# EAGLE board cog-1602-v0 (EAGLE 5.07)
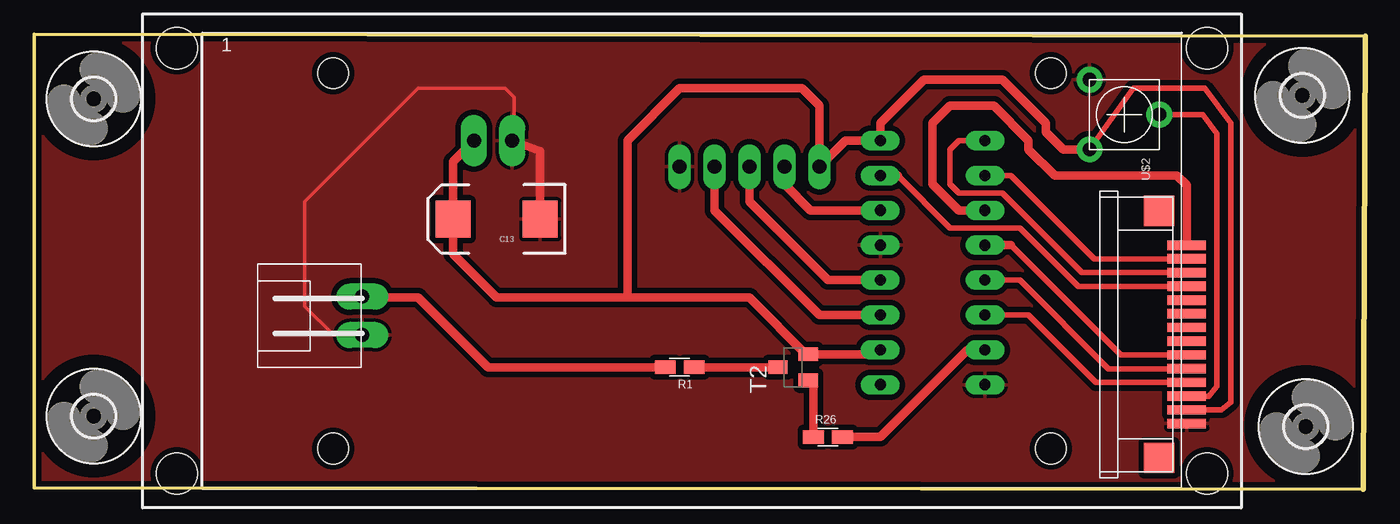
[diagram p0: board, top side]
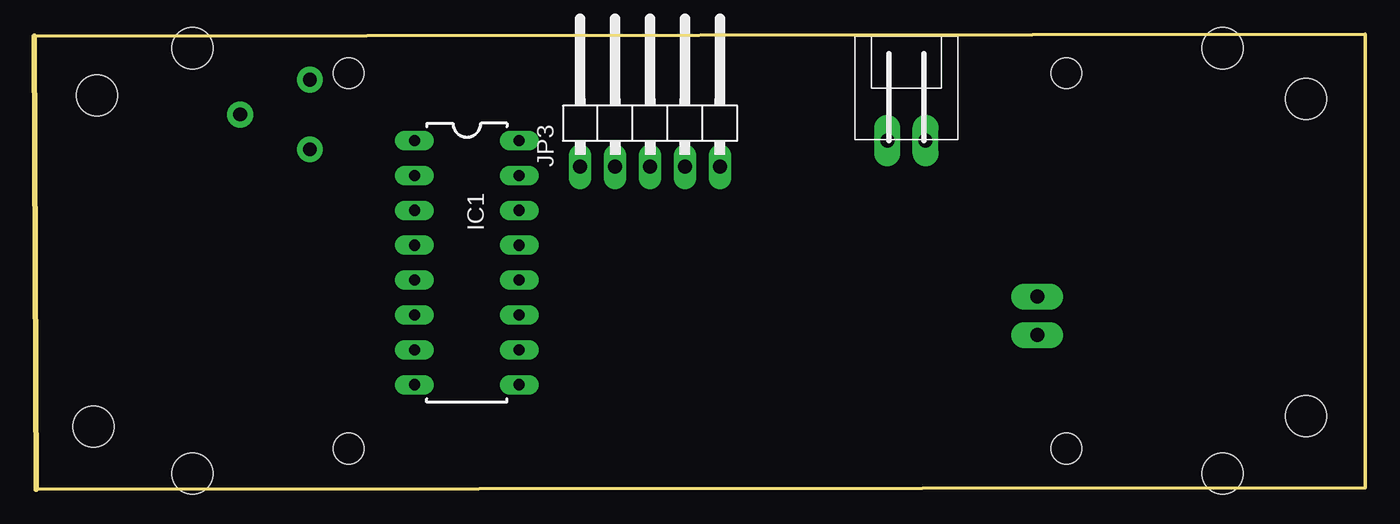
[diagram p1: board, bottom side, seen from below]

Size 96.9 x 33.15 mm. Coordinates in mm from the lower left corner, seen from the top.
Outline: 0,0.13 0,33.15 96.9,33.02 96.77,0 0,0.13
Copper layers (1*16): Top 0.035mm / dielectric 1.5mm / Bottom 0.035mm
Design rules "SparkFun": minimum track width 8mil, minimum drill 20mil, track to track 8mil, track to pad 8mil, pad to pad 8mil, via to via 8mil, smd to smd 8mil, copper to edge 10mil, drill to drill 8mil, minimum pad ring 12mil, minimum via ring 10mil, stop-mask expansion 4mil, vias tented up to drill 25mil, thermal gap 10mil

## Footprints (pad centres in the part's own frame; a part is rotated, then mirrored left to right if it is on the bottom)
EIA7343 = smd 2.55 x 2.7: A 3.17,0; C -3.17,0
3,0 = hole 3: 0,0
DIL16 = drill 0.813 long: 1 -8.89,-3.81; 2 -6.35,-3.81; 3 -3.81,-3.81; 4 -1.27,-3.81; 5 1.27,-3.81; 6 3.81,-3.81; 7 6.35,-3.81; 8 8.89,-3.81; 9 8.89,3.81; 10 6.35,3.81; 11 3.81,3.81; 12 1.27,3.81; 13 -1.27,3.81; 14 -3.81,3.81; 15 -6.35,3.81; 16 -8.89,3.81
XH-1X2-LONG-LOCK = drill 1.016 pad 1.88 long: 1 1.397,0; 2 -1.397,0
1X05/90 = drill 1.016 long: 1 -5.08,-3.81; 2 -2.54,-3.81; 3 0,-3.81; 4 2.54,-3.81; 5 5.08,-3.81
R0805W = smd 1.5 x 1: 1 -1.052,0; 2 1.052,0
SOT23-BEC = smd 1 x 1.4: B -0.95,-1.1; C 0,1.1; E 0.95,-1.1
LCD-1602-YHDS = drill 1.016 pad 1.88 long: A -24,-2.603; K -24,-5.397 | smd 2.8 x 0.68: P$1 36.02,-11.85; P$2 36.02,-10.85; P$3 36.02,-9.85; P$4 36.02,-8.85; P$5 36.02,-7.85; P$6 36.02,-6.85; P$7 36.02,-5.85; P$8 36.02,-4.85; P$9 36.02,-3.85; P$10 36.02,-2.85; P$11 36.02,-1.85; P$12 36.02,-0.85; P$13 36.02,0.15; P$14 36.02,1.15 | smd 2.2 x 2.2: PAD1 34.02,3.65; PAD2 34.02,-14.35 | hole 3: -37.5,15.5; -37.5,-15.5; 37.5,15.5; 37.5,-15.5 | hole 2.24: -26.13,13.67; -26.13,-13.67; 26.13,-13.67; 26.13,13.67
TRIM_POT_PTH = drill 1 pad 1.88 round: 1 -2.54,-2.54; 2 0,2.54; 3 2.54,-2.54

## Placement (x,y rotation side)
C13  10u  [EIA7343]  33.66,19.68 180 top
H1  MOUNT-HOLE3.0  [3,0]  4.32,28.45 0 top
H2  MOUNT-HOLE3.0  [3,0]  4.32,5.33 0 top
H3  MOUNT-HOLE3.0  [3,0]  92.58,4.57 0 top
H4  MOUNT-HOLE3.0  [3,0]  92.33,28.7 0 top
IC1  74LS595N  [DIL16]  65.41,16.51 270 bottom
JP1  [XH-1X2-LONG-LOCK]  33.4,25.4 0 bottom
JP3  [1X05/90]  52.07,27.3 0 bottom
R1  20R  [R0805W]  46.99,8.89 180 top
R26  1k  [R0805W]  57.78,3.81 0 top
T2  8550  [SOT23-BEC]  55.24,8.89 90 top
U$1  LCD-16X2  [LCD-1602-YHDS]  47.88,16.64 0 top
U$2  10k  [TRIM_POT_PTH]  79.38,27.3 270 top

## Library data of the parts
C13 IC1 U$2 = SparkFun
H1-H4 = holes
JP1 R1 R26 T2 U$1 = digital-toy
JP3 = pinhead

## Nets
GND: C13.C IC1.8 IC1.13 JP1.2 JP3.5 U$1.K U$1.P$1 U$2.1
N$1: IC1.15 U$1.P$11
N$2: IC1.1 U$1.P$12
N$3: IC1.2 U$1.P$13
N$4: IC1.3 U$1.P$14
N$5: IC1.4 U$1.P$6
N$6: IC1.5 U$1.P$5
N$7: IC1.6 U$1.P$4
N$8: IC1.7 R26.2
N$10: IC1.14 JP3.2
N$11: IC1.11 JP3.4
N$13: IC1.12 JP3.3
N$15: U$1.P$3 U$2.2
N$16: R1.2 U$1.A
N$19: R1.1 T2.C
N$55: R26.1 T2.B
VCC: C13.A IC1.10 IC1.16 JP1.1 JP3.1 T2.E U$1.P$2 U$2.3

## Tracks (layer width: path | path; a pad name or v marks a point on that pad's centre or on a via)
GND
  Top 0.254: U$1.K 21.78,11.24 19.68,13.34 19.68,20.96 27.94,29.21 34.29,29.21 34.92,28.57 34.92,26.54 | 34.92,26.54 34.92,26.04 | 34.92,26.54 JP1.2
  Top 0.61: C13.C 36.82,24.64 JP1.2
  pour Top (isolate 0.406): 0,44.45 0,45.72 97.79,45.72 97.79,-11.43 0.63,-11.43 0.63,44.45
N$1
  Top 0.406: U$1.P$11 76.02,14.79 71.76,19.05 66.67,19.05 62.86,22.86
  Top 0.61: IC1.15 62.86,22.86
N$2
  Top 0.406: U$1.P$12 76.29,15.79 70.48,21.59 67.31,21.59 66.67,22.23 66.67,24.77 67.31,25.4 IC1.1
N$3
  Top 0.406: U$1.P$13 77.19,16.79 71.12,22.86 IC1.2
N$4
  Top 0.61: U$1.P$14 83.9,22.15 83.19,22.86 74.3,22.86 72.39,24.77 72.39,25.4 69.85,27.94 66.67,27.94 65.41,26.67 65.41,22.23 67.31,20.32 IC1.3
N$5
  Top 0.406: U$1.P$6 79.11,9.79 71.12,17.78
  Top 0.61: IC1.4 71.12,17.78
N$6
  Top 0.254: IC1.5 68.58,15.24
  Top 0.406: U$1.P$5 78.21,8.79 71.76,15.24 IC1.5
N$7
  Top 0.406: U$1.P$4 77.3,7.79 72.39,12.7 IC1.6
N$8
  Top 0.61: R26.2 61.59,3.81 67.95,10.16 IC1.7
N$10
  Top 0.406: JP3.2 54.61,22.23
  Top 0.61: IC1.14 56.52,20.32 54.61,22.23
N$11
  Top 0.61: IC1.11 57.15,12.7 49.53,20.32 JP3.4
N$13
  Top 0.61: IC1.12 57.78,15.24 52.07,20.96 JP3.3
N$15
  Top 0.406: U$1.P$3 85.53,6.79 86.11,7.49 86.11,25.91 85.09,27.3 U$2.2
N$16
  Top 0.254: U$1.A 23.94,13.97
  Top 0.61: R1.2 33.02,8.89 27.94,13.97 23.94,13.97
N$19
  Top 0.61: R1.1 T2.C
N$55
  Top 0.61: R26.1 56.73,7.55 T2.B
VCC
  Top 0.254: 61.27,9.84 IC1.10 | C13.A
  Top 0.406: U$1.P$2 86.43,5.79 87.12,6.35 87.12,26.67 85.22,29.21 80.01,29.21 U$2.3
  Top 0.61: 61.27,9.84 T2.E 56.34,9.7 52.07,13.97 43.18,13.97 | C13.A 30.48,23.88 JP1.1 | U$2.3 74.93,24.77 73.66,26.04 73.66,26.67 70.48,29.84 64.77,29.84 61.59,26.67 IC1.16 59.05,25.4 JP3.1 57.15,27.94 55.88,29.21 46.99,29.21 43.18,25.4 43.18,13.97 | 43.18,13.97 33.66,13.97 30.48,17.14 C13.A